# Altium PCB Copy of KNX_Relay_16CH_V1.2.PcbDoc (part 2 of 2)
Units mm, origin at the board's own origin, x right, y up, seen from the top; angles counter-clockwise.
Board outline 84.5 x 146.28 mm, 2 copper layers (F.Cu, B.Cu); 185 components, 162 nets, 571 pads, 629 vias.
Unrouted connection lines stored in the file: 248.
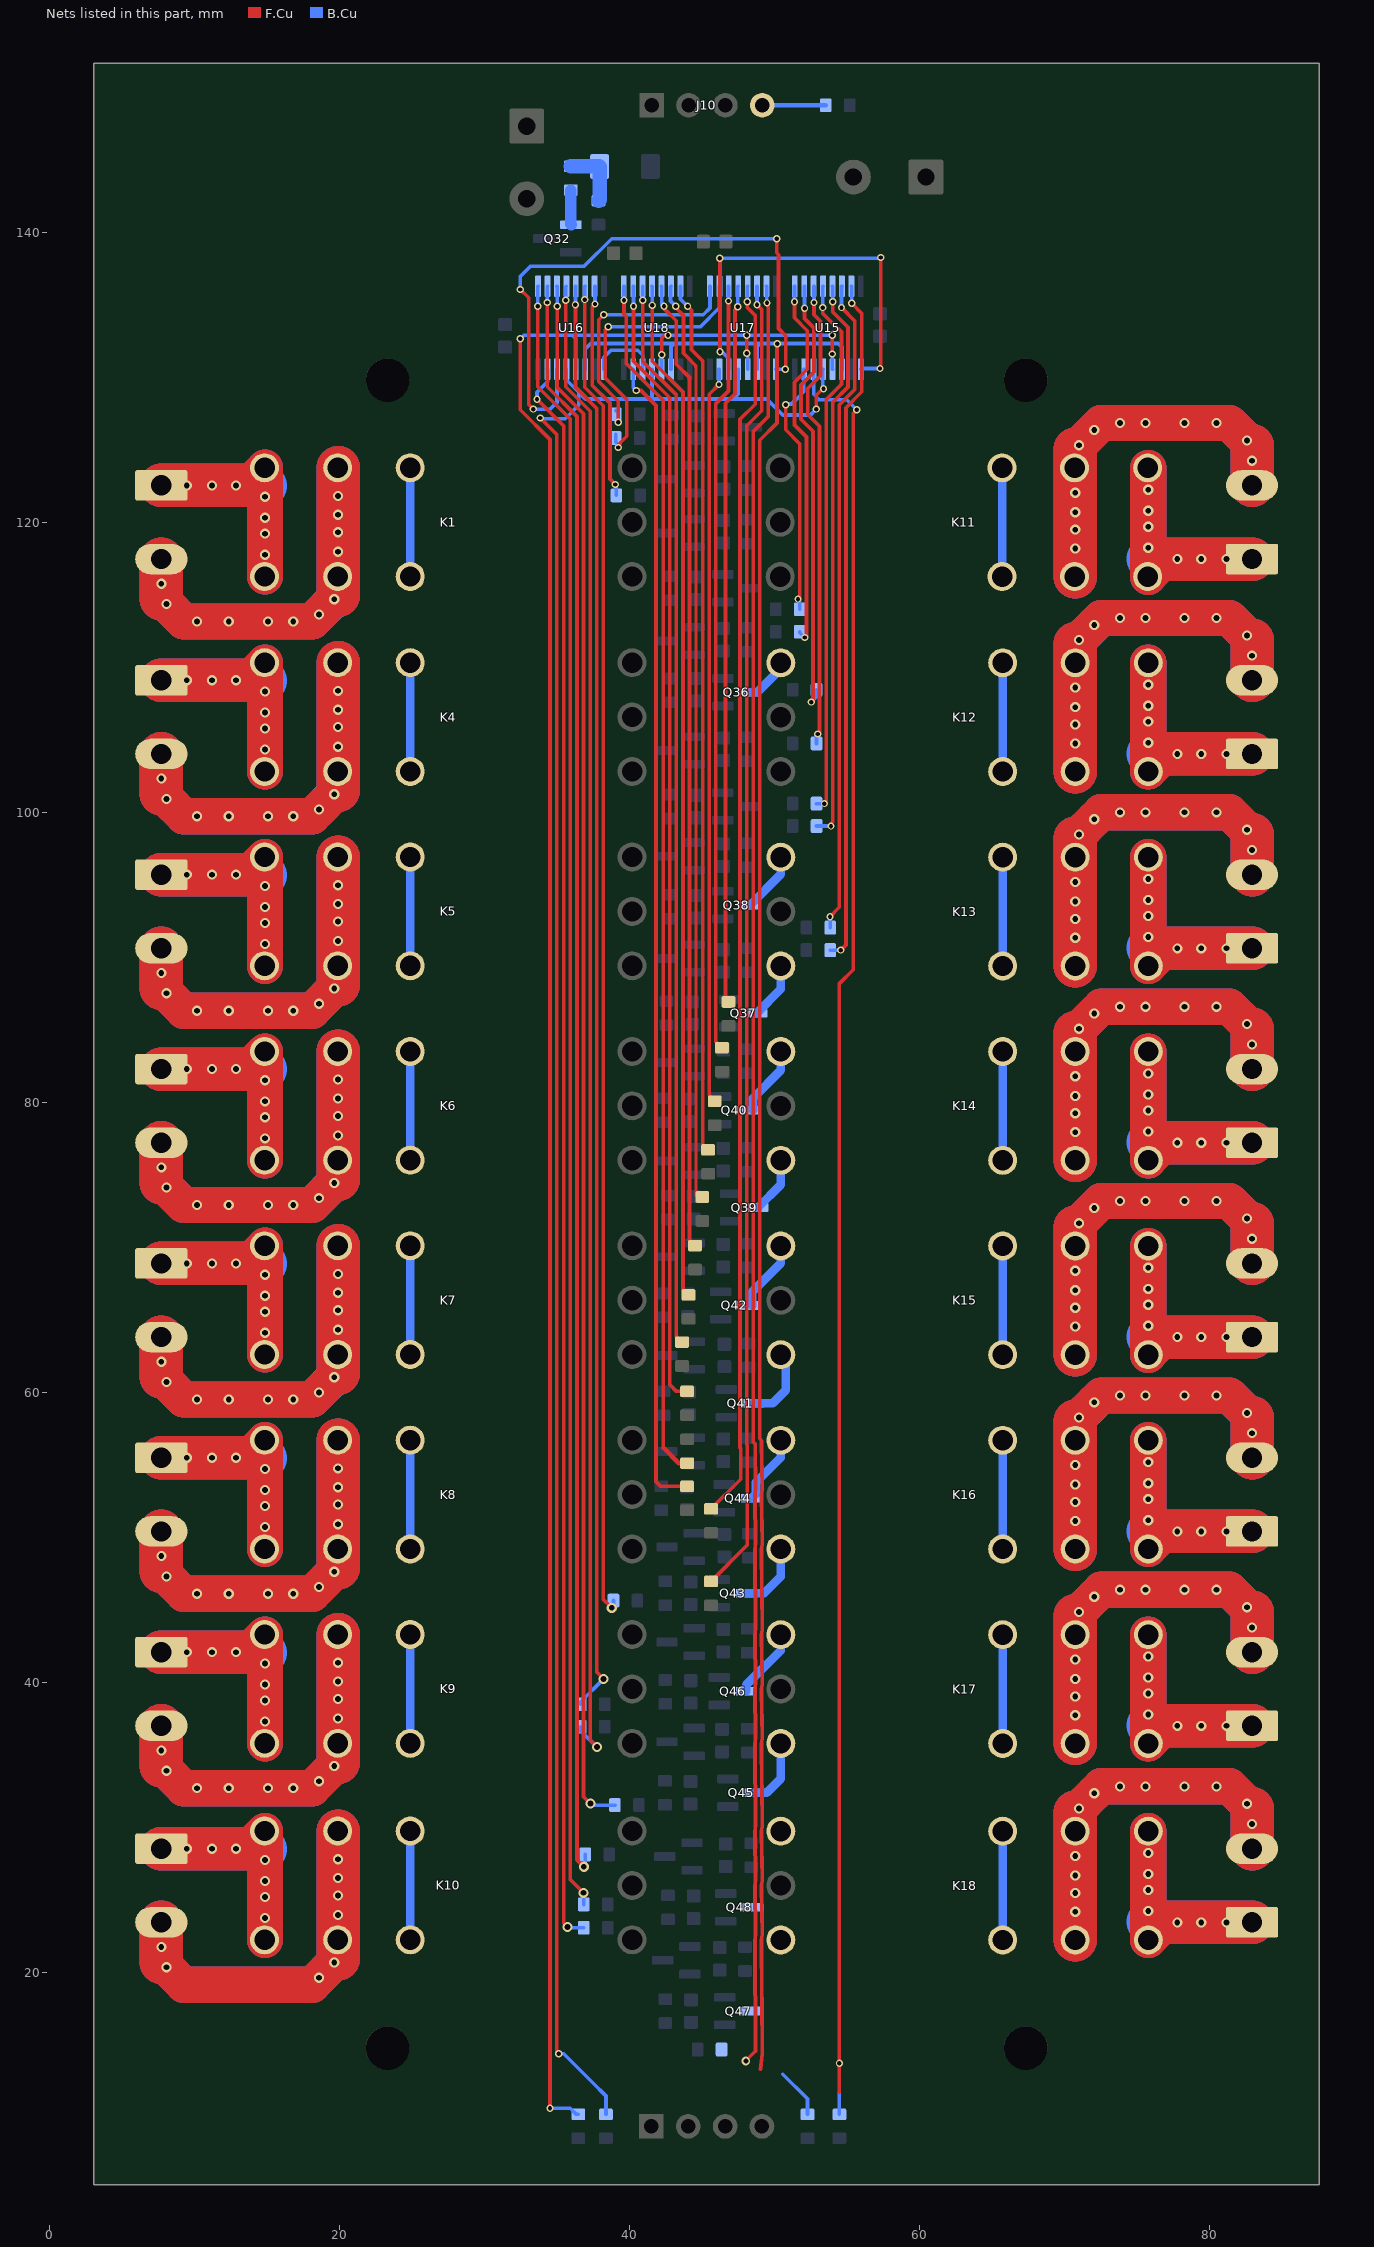
[diagram p2: the nets of this part, all layers, seen from the top]

## Via types
v1: diameter 0.7, hole 0.4, F.Cu to B.Cu, tented both sides, 342 vias
v2: diameter 0.6, hole 0.35, F.Cu to B.Cu, tented both sides, 198 vias
v3: diameter 0.5, hole 0.3, F.Cu to B.Cu, tented both sides, 83 vias
v4: diameter 0.7, hole 0.35, F.Cu to B.Cu, tented both sides, 6 vias

## Nets (pads, with @x,y where several pads share a name; then routed paths per layer and width w, separated by ;. In a path a pad name is that pad's centre, name@x,y a point inside that pad or via, vN(x,y) a via of type N, cw(c..) or ccw(c..) an arc to the next point about the centre after c; other vN are vias at no path point) (continued)
NetK12_A2: K12.A2 Q36.3 | length 3.2
  B.Cu w0.6: Q36.3@48.288,108.265 48.781,108.265 50.41,109.894 K12.A2@50.41,110.297
NetK13_A1: K13.A1 Q37.3 | length 3.9
  B.Cu w0.6: Q37.3@48.747,86.14 50.41,87.802 K13.A1@50.41,89.396
NetK13_A2: K13.A2 Q38.3 | length 4.2
  B.Cu w0.6: Q38.3@48.288,93.59 50.41,95.712 K13.A2@50.41,96.896
NetK14_A1: K14.A1 Q39.3 | length 3.9
  B.Cu w0.6: Q39.3@48.837,72.74 50.41,74.312 K14.A1@50.41,75.994
NetK14_A2: K14.A2 Q40.3 | length 4.9
  B.Cu w0.6: Q40.3@48.488,79.44 48.488,80.278 50.41,82.2 K14.A2@50.41,83.494
NetK15_A1: K15.A1 Q41.3 | length 5.2
  B.Cu w0.6: Q41.3@48.538,59.24 49.85,59.24 50.75,60.14 50.75,62.253 K15.A1@50.41,62.593
NetK15_A2: K15.A2 Q42.3 | length 4.9
  B.Cu w0.6: Q42.3@48.438,65.99 48.438,66.927 50.41,68.9 K15.A2@50.41,70.093
NetK16_A1: K16.A1 Q43.3 | length 4.7
  B.Cu w0.6: Q43.3@48.038,46.14 49.25,46.14 50.41,47.3 K16.A1@50.41,49.191
NetK16_A2: K16.A2 Q44.3 | length 4.8
  B.Cu w0.6: Q44.3@48.388,52.69 48.7,53.003 48.7,53.79 50.41,55.5 K16.A2@50.41,56.691
NetK17_A1: K17.A1 Q45.3 | length 4.6
  B.Cu w0.6: Q45.3@48.637,32.39 49.45,32.39 50.41,33.35 K17.A1@50.41,35.79
NetK17_A2: K17.A2 Q46.3 | length 4.9
  B.Cu w0.6: Q46.3@48.038,39.39 48.038,39.827 50.41,42.2 K17.A2@50.41,43.29
NetK18_A1: K18.A1 Q47.3
NetK18_A2: K18.A2 Q48.3
NetQ32_1: Q32.1 R85.1 | length 2.4
  B.Cu w0.8: R85.1@35.935,142.89 35.935,140.527 Q32.1@35.973,140.49
NetR84_2: R84.2 R85.2 Z2.2 | length 4.4
  B.Cu w1: R85.2@35.935,144.54 37.895,144.54 Z2.2@37.92,144.515 37.92,142.24 R84.2@37.845,142.165
NetU15_9: U15.9 U17.14 | length 28.1
  F.Cu w0.254: v3(46.2,138.19) 46.223,138.167 v3(46.223,131.736) ; v3(57.25,130.59) 57.3,130.64 v3(57.3,138.24)
  B.Cu w0.254: v3(46.2,138.19) 57.25,138.19 v3(57.3,138.24) ; v3(46.223,131.736) 46.367,131.736 46.825,131.277 U17.14@46.825,130.54 ; U15.9@55.925,130.54 55.975,130.59 v3(57.25,130.59)
NetU16_9: U16.9 U18.14 | length 4.8
  B.Cu w0.254: U16.9@38.225,130.54 38.225,131.365 38.7,131.84 40.55,131.84 40.885,131.505 U18.14@40.885,130.54
NetU16_14: U16.14 U17.9 | length 42.3
  F.Cu w0.254: v3(32.45,136.04) 33.027,135.463 33.027,128.113 v3(33.35,127.79) ; v3(50.127,139.54) 50.127,138.563 50.25,138.44 50.25,133.34 50.75,132.84 50.75,130.565 v3(50.725,130.54)
  B.Cu w0.254: v3(32.45,136.04) 32.45,136.94 33.15,137.64 36.85,137.64 38.75,139.54 v3(50.127,139.54) ; v3(33.35,127.79) 34.516,127.79 34.975,128.249 U16.14@34.975,130.54 ; U17.9@50.075,130.54 v3(50.725,130.54)
R1_A1: R34.2 U17.2 | length 19.9
  F.Cu w0.254: v3(38.508,133.467) 38.308,133.267 38.308,129.932 39.782,128.458 39.782,127.129 39.782,126.651 39.782,125.917 39.205,125.34 v3(39.205,125.14)
  B.Cu w0.254: v3(38.508,133.467) 44.869,133.467 46.175,134.773 U17.2@46.175,136.265 ; R34.2@39.025,126.04 39.025,125.52 39.205,125.34 v3(39.205,125.14)
R1_A2: R33.2 U16.7 | length 15.2
  F.Cu w0.254: v3(37.6,135.04) 37.4,134.84 37.4,129.442 38.628,128.214 38.628,122.963 v3(39.001,122.59)
  B.Cu w0.254: U16.7@37.575,136.265 37.6,136.24 v3(37.6,135.04) ; v3(39.001,122.59) 39.075,122.516 R33.2@39.075,121.84
R1_COM: J1.2 K1.11 | length 50.2
  F.Cu w2.5: 7.7,114.702 v1(8.05,114.352) 9.25,113.152 v1(10.15,113.152) v1(12.35,113.152) v1(15.05,113.152) v1(16.8,113.152) 18.1,113.152 v1(18.575,113.627) v1(19.625,114.677) 19.89,114.942
  F.Cu w3: 7.7,114.702 v1(7.7,115.752) J1.2@7.7,117.45 ; 19.89,114.942 19.89,116.245 v1(19.89,117.952) v1(19.89,119.302) v1(19.89,120.502) v1(19.89,121.802) K1.11@19.89,123.745
  B.Cu w2.5: 7.7,114.702 9.25,113.152 18.1,113.152 19.89,114.942
  B.Cu w3: 7.7,114.702 J1.2@7.7,117.45 ; 19.89,114.942 19.89,116.245 K1.11@19.89,123.745
R1_NC: K1.12 | length 7.5
  B.Cu w0.6: K1.12@24.86,116.245 K1.12@24.86,123.745
R1_NO: J1.1 K1.14 | length 29.8
  F.Cu w2.5: 13.635,122.53 14.85,123.745 v1(14.85,121.752) v1(14.85,120.302) v1(14.85,119.202) v1(14.85,117.752) K1.14@14.85,116.245
  F.Cu w3: J1.1@7.7,122.53 v1(9.45,122.53) v1(11.2,122.53) v1(12.85,122.53) 13.635,122.53
  B.Cu w2.5: K1.14@14.85,116.245 14.85,122.502 K1.14@14.85,123.745
  B.Cu w3: J1.1@7.7,122.53 14.822,122.53 14.85,122.502
R2_A1: R57.2 U15.1 | length 25.9
  F.Cu w0.254: v3(51.35,135.19) 51.35,134.09 52.242,133.198 52.242,130.532 51.35,129.64 51.35,126.69 52.176,125.864 52.176,112.163 v3(52.053,112.04)
  B.Cu w0.254: v3(51.35,135.19) 51.35,136.24 U15.1@51.375,136.265 ; R57.2@51.725,112.44 51.725,112.368 v3(52.053,112.04)
R2_A2: R56.2 U15.3 | length 32.5
  F.Cu w0.254: v3(52.7,135.14) 52.7,134.29 53.15,133.84 53.15,130.09 52.258,129.198 52.258,127.432 53.084,126.606 53.084,105.513 v3(52.961,105.39)
  B.Cu w0.254: U15.3@52.675,136.265 52.7,136.24 v3(52.7,135.14) ; R56.2@52.875,104.74 52.875,105.304 v3(52.961,105.39)
R2_COM: J2.2 K4.11 | length 50.2
  F.Cu w2.5: 7.7,101.265 v1(8.05,100.915) 9.25,99.715 v1(10.15,99.715) v1(12.35,99.715) v1(15.05,99.715) v1(16.8,99.715) 18.1,99.715 v1(18.575,100.19) v1(19.625,101.24) 19.89,101.505
  F.Cu w3: 7.7,101.265 v1(7.7,102.315) J2.2@7.7,104.012 ; 19.89,101.505 19.89,102.807 v1(19.89,104.515) v1(19.89,105.865) v1(19.89,107.065) v1(19.89,108.365) K4.11@19.89,110.307
  B.Cu w2.5: 7.7,101.265 9.25,99.715 18.1,99.715 19.89,101.505
  B.Cu w3: 7.7,101.265 J2.2@7.7,104.012 ; 19.89,101.505 19.89,102.807 K4.11@19.89,110.307
R2_NC: K4.12 | length 7.5
  B.Cu w0.6: K4.12@24.86,102.807 K4.12@24.86,110.307
R2_NO: J2.1 K4.14 | length 29.8
  F.Cu w2.5: 13.635,109.092 14.85,110.307 v1(14.85,108.315) v1(14.85,106.865) v1(14.85,105.765) v1(14.85,104.315) K4.14@14.85,102.807
  F.Cu w3: J2.1@7.7,109.092 v1(9.45,109.092) v1(11.2,109.092) v1(12.85,109.092) 13.635,109.092
  B.Cu w2.5: K4.14@14.85,102.807 14.85,109.065 K4.14@14.85,110.307
  B.Cu w3: J2.1@7.7,109.092 14.822,109.092 14.85,109.065
R3_A1: R61.2 U15.5 | length 39.2
  F.Cu w0.254: v3(53.869,99.04) 53.869,99.209 53.992,99.332 53.992,128.266 55.046,129.32 55.046,133.436 53.992,134.49 53.992,135.182 v3(54,135.19)
  B.Cu w0.254: R61.2@52.875,99.04 v3(53.869,99.04) ; U15.5@53.975,136.265 54,136.24 v3(54,135.19)
R3_A2: R60.2 U15.7 | length 47.4
  F.Cu w0.254: v3(54.55,90.49) 54.9,90.84 54.9,127.89 56,128.99 56,134.39 v3(55.3,135.09)
  B.Cu w0.254: R60.2@53.825,90.49 v3(54.55,90.49) ; U15.7@55.275,136.265 55.3,136.24 v3(55.3,135.09)
R3_COM: J3.2 K5.11 | length 50.2
  F.Cu w2.5: 7.7,87.863 v1(8.05,87.513) 9.25,86.313 v1(10.15,86.313) v1(12.35,86.313) v1(15.05,86.313) v1(16.8,86.313) 18.1,86.313 v1(18.575,86.788) v1(19.625,87.838) 19.89,88.103
  F.Cu w3: 7.7,87.863 v1(7.7,88.913) J3.2@7.7,90.611 ; 19.89,88.103 19.89,89.406 v1(19.89,91.113) v1(19.89,92.463) v1(19.89,93.663) v1(19.89,94.963) K5.11@19.89,96.906
  B.Cu w2.5: 7.7,87.863 9.25,86.313 18.1,86.313 19.89,88.103
  B.Cu w3: 7.7,87.863 J3.2@7.7,90.611 ; 19.89,88.103 19.89,89.406 K5.11@19.89,96.906
R3_NC: K5.12 | length 7.5
  B.Cu w0.6: K5.12@24.86,89.406 K5.12@24.86,96.906
R3_NO: J3.1 K5.14 | length 29.8
  F.Cu w2.5: 13.635,95.691 14.85,96.906 v1(14.85,94.913) v1(14.85,93.463) v1(14.85,92.363) v1(14.85,90.913) K5.14@14.85,89.406
  F.Cu w3: J3.1@7.7,95.691 v1(9.45,95.691) v1(11.2,95.691) v1(12.85,95.691) 13.635,95.691
  B.Cu w2.5: K5.14@14.85,89.406 14.85,95.663 K5.14@14.85,96.906
  B.Cu w3: J3.1@7.7,95.691 14.822,95.691 14.85,95.663
R4_A1: R65.2 U17.3 | length 53
  F.Cu w0.254: R65.2@46.35,83.765 45.936,84.179 45.936,128.176 46.8,129.04 v3(46.8,135.24)
  B.Cu w0.254: v3(46.8,135.24) 46.8,136.24 U17.3@46.825,136.265
R4_A2: R64.2 U18.7 | length 60.3
  F.Cu w0.254: v3(43.983,134.88) 44.25,134.613 44.25,131.89 45.028,131.112 45.028,77.087 R64.2@45.4,76.715
  B.Cu w0.254: U18.7@43.485,136.265 43.5,136.25 43.5,135.363 v3(43.983,134.88)
R4_COM: J4.2 K6.11 | length 50.2
  F.Cu w2.5: 7.7,74.462 v1(8.05,74.112) 9.25,72.912 v1(10.15,72.912) v1(12.35,72.912) v1(15.05,72.912) v1(16.8,72.912) 18.1,72.912 v1(18.575,73.387) v1(19.625,74.437) 19.89,74.702
  F.Cu w3: 7.7,74.462 v1(7.7,75.512) J4.2@7.7,77.209 ; 19.89,74.702 19.89,76.004 v1(19.89,77.712) v1(19.89,79.062) v1(19.89,80.262) v1(19.89,81.562) K6.11@19.89,83.504
  B.Cu w2.5: 7.7,74.462 9.25,72.912 18.1,72.912 19.89,74.702
  B.Cu w3: 7.7,74.462 J4.2@7.7,77.209 ; 19.89,74.702 19.89,76.004 K6.11@19.89,83.504
R4_NC: K6.12 | length 7.5
  B.Cu w0.6: K6.12@24.86,76.004 K6.12@24.86,83.504
R4_NO: J4.1 K6.14 | length 29.8
  F.Cu w2.5: 13.635,82.289 14.85,83.504 v1(14.85,81.512) v1(14.85,80.062) v1(14.85,78.962) v1(14.85,77.512) K6.14@14.85,76.004
  F.Cu w3: J4.1@7.7,82.289 v1(9.45,82.289) v1(11.2,82.289) v1(12.85,82.289) 13.635,82.289
  B.Cu w2.5: K6.14@14.85,76.004 14.85,82.262 K6.14@14.85,83.504
  B.Cu w3: J4.1@7.7,82.289 14.822,82.289 14.85,82.262
R5_A1: R69.2 U18.5 | length 67.1
  F.Cu w0.254: v3(42.355,134.88) 42.355,134.735 43.21,133.88 43.21,130.88 44.12,129.97 44.12,70.495 R69.2@44.5,70.115
  B.Cu w0.254: U18.5@42.185,136.265 42.2,136.25 42.2,135.035 v3(42.355,134.88)
R5_A2: R68.2 U18.3 | length 73.9
  F.Cu w0.254: v3(40.9,135.29) 40.9,131.074 43.212,128.762 43.212,63.853 R68.2@43.6,63.465
  B.Cu w0.254: U18.3@40.885,136.265 40.9,136.25 v3(40.9,135.29)
R5_COM: J5.2 K7.11 | length 50.2
  F.Cu w2.5: 7.7,61.06 v1(8.05,60.71) 9.25,59.51 v1(10.15,59.51) v1(12.35,59.51) v1(15.05,59.51) v1(16.8,59.51) 18.1,59.51 v1(18.575,59.985) v1(19.625,61.035) 19.89,61.3
  F.Cu w3: 7.7,61.06 v1(7.7,62.11) J5.2@7.7,63.808 ; 19.89,61.3 19.89,62.603 v1(19.89,64.31) v1(19.89,65.66) v1(19.89,66.86) v1(19.89,68.16) K7.11@19.89,70.103
  B.Cu w2.5: 7.7,61.06 9.25,59.51 18.1,59.51 19.89,61.3
  B.Cu w3: 7.7,61.06 J5.2@7.7,63.808 ; 19.89,61.3 19.89,62.603 K7.11@19.89,70.103
R5_NC: K7.12 | length 7.5
  B.Cu w0.6: K7.12@24.86,62.603 K7.12@24.86,70.103
R5_NO: J5.1 K7.14 | length 29.8
  F.Cu w2.5: 13.635,68.888 14.85,70.103 v1(14.85,68.11) v1(14.85,66.66) v1(14.85,65.56) v1(14.85,64.11) K7.14@14.85,62.603
  F.Cu w3: J5.1@7.7,68.888 v1(9.45,68.888) v1(11.2,68.888) v1(12.85,68.888) 13.635,68.888
  B.Cu w2.5: K7.14@14.85,62.603 14.85,68.86 K7.14@14.85,70.103
  B.Cu w3: J5.1@7.7,68.888 14.822,68.888 14.85,68.86
R6_A1: R73.2 U18.1 | length 83.3
  F.Cu w0.254: v3(39.6,135.29) 39.6,134.34 39.75,134.19 39.75,130.94 42.304,128.386 42.304,56.19
  F.Cu w0.3: 42.304,56.19 43.379,55.115 R73.2@43.95,55.115
  B.Cu w0.254: U18.1@39.585,136.265 39.6,136.25 v3(39.6,135.29)
R6_A2: R72.2 U17.5 | length 85.8
  F.Cu w0.254: R72.2@45.6,51.965 47.646,54.011 47.646,55.966 47.646,56.154 47.602,56.198 47.602,56.407 47.602,127.09 48.642,128.13 48.642,134.248 48.1,134.79 v3(48.1,135.19)
  B.Cu w0.254: v3(48.1,135.19) 48.1,136.24 U17.5@48.125,136.265
R6_COM: J6.2 K8.11 | length 50.2
  F.Cu w2.5: 7.7,47.659 v1(8.05,47.309) 9.25,46.109 v1(10.15,46.109) v1(12.35,46.109) v1(15.05,46.109) v1(16.8,46.109) 18.1,46.109 v1(18.575,46.584) v1(19.625,47.634) 19.89,47.899
  F.Cu w3: 7.7,47.659 v1(7.7,48.709) J6.2@7.7,50.406 ; 19.89,47.899 19.89,49.201 v1(19.89,50.909) v1(19.89,52.259) v1(19.89,53.459) v1(19.89,54.759) K8.11@19.89,56.701
  B.Cu w2.5: 7.7,47.659 9.25,46.109 18.1,46.109 19.89,47.899
  B.Cu w3: 7.7,47.659 J6.2@7.7,50.406 ; 19.89,47.899 19.89,49.201 K8.11@19.89,56.701
R6_NC: K8.12 | length 7.5
  B.Cu w0.6: K8.12@24.86,49.201 K8.12@24.86,56.701
R6_NO: J6.1 K8.14 | length 29.8
  F.Cu w2.5: 13.635,55.486 14.85,56.701 v1(14.85,54.709) v1(14.85,53.259) v1(14.85,52.159) v1(14.85,50.709) K8.14@14.85,49.201
  F.Cu w3: J6.1@7.7,55.486 v1(9.45,55.486) v1(11.2,55.486) v1(12.85,55.486) 13.635,55.486
  B.Cu w2.5: K8.14@14.85,49.201 14.85,55.459 K8.14@14.85,56.701
  B.Cu w3: J6.1@7.7,55.486 14.822,55.486 14.85,55.459
R7_A1: R77.2 U16.6 | length 92.5
  F.Cu w0.254: v3(36.9,135.34) 36.9,129.3 38.174,128.026 38.174,45.716 v1(38.75,45.14)
  B.Cu w0.254: v3(36.9,135.34) 36.9,136.24 U16.6@36.925,136.265
  B.Cu w0.3: v1(38.75,45.14) 38.875,45.265 R77.2@38.875,45.64
R7_A2: R76.2 U16.4 | length 103.5
  F.Cu w0.254: v3(35.577,135.29) 35.577,135.129 35.577,134.651 35.577,129.339 37.266,127.65 37.266,36.013 v1(37.739,35.54)
  B.Cu w0.254: v3(35.577,135.29) 35.577,136.217 U16.4@35.625,136.265 ; R76.2@36.625,36.94 36.625,36.654 v1(37.739,35.54)
R7_COM: J7.2 K9.11 | length 50.2
  F.Cu w2.5: 7.7,34.257 v1(8.05,33.907) 9.25,32.707 v1(10.15,32.707) v1(12.35,32.707) v1(15.05,32.707) v1(16.8,32.707) 18.1,32.707 v1(18.575,33.182) v1(19.625,34.232) 19.89,34.497
  F.Cu w3: 7.7,34.257 v1(7.7,35.307) J7.2@7.7,37.005 ; 19.89,34.497 19.89,35.8 v1(19.89,37.507) v1(19.89,38.857) v1(19.89,40.057) v1(19.89,41.357) K9.11@19.89,43.3
  B.Cu w2.5: 7.7,34.257 9.25,32.707 18.1,32.707 19.89,34.497
  B.Cu w3: 7.7,34.257 J7.2@7.7,37.005 ; 19.89,34.497 19.89,35.8 K9.11@19.89,43.3
R7_NC: K9.12 | length 7.5
  B.Cu w0.6: K9.12@24.86,35.8 K9.12@24.86,43.3
R7_NO: J7.1 K9.14 | length 29.8
  F.Cu w2.5: 13.635,42.085 14.85,43.3 v1(14.85,41.307) v1(14.85,39.857) v1(14.85,38.757) v1(14.85,37.307) K9.14@14.85,35.8
  F.Cu w3: J7.1@7.7,42.085 v1(9.45,42.085) v1(11.2,42.085) v1(12.85,42.085) 13.635,42.085
  B.Cu w2.5: K9.14@14.85,35.8 14.85,42.057 K9.14@14.85,43.3
  B.Cu w3: J7.1@7.7,42.085 14.822,42.085 14.85,42.057
R8_A1: R81.2 U16.2 | length 110.9
  F.Cu w0.254: v3(34.303,135.141) 34.303,129.329 36.358,127.274 36.358,27.763 v1(36.831,27.29)
  B.Cu w0.254: v3(34.303,135.141) 34.303,136.243 U16.2@34.325,136.265 ; v1(36.831,27.29) 36.925,27.384 R81.2@36.925,28.14
R8_A2: R80.2 U16.15 | length 109.7
  F.Cu w0.254: v3(33.604,128.472) 35.45,126.626 35.45,23.39 v1(35.7,23.14)
  B.Cu w0.254: v3(33.604,128.472) 33.604,128.944 34.35,129.69 34.35,130.515 U16.15@34.325,130.54 ; v1(35.7,23.14) 35.75,23.09 R80.2@36.825,23.09
R8_COM: J8.2 K10.11 | length 50.2
  F.Cu w2.5: 7.7,20.707 v1(8.05,20.357) 9.25,19.157 10.15,19.157 12.35,19.157 15.05,19.157 16.8,19.157 18.1,19.157 v1(18.575,19.632) v1(19.625,20.682) 19.89,20.947
  F.Cu w3: 7.7,20.707 v1(7.7,21.757) J8.2@7.7,23.455 ; 19.89,20.947 19.89,22.25 v1(19.89,23.957) v1(19.89,25.307) v1(19.89,26.507) v1(19.89,27.807) K10.11@19.89,29.75
  B.Cu w2.5: 7.7,20.707 9.25,19.157 18.1,19.157 19.89,20.947
  B.Cu w3: 7.7,20.707 J8.2@7.7,23.455 ; 19.89,20.947 19.89,22.25 K10.11@19.89,29.75
R8_NC: K10.12 | length 7.5
  B.Cu w0.6: K10.12@24.86,22.25 K10.12@24.86,29.75
R8_NO: J8.1 K10.14 | length 29.8
  F.Cu w2.5: 13.635,28.535 14.85,29.75 v1(14.85,27.757) v1(14.85,26.307) v1(14.85,25.207) v1(14.85,23.757) K10.14@14.85,22.25
  F.Cu w3: J8.1@7.7,28.535 v1(9.45,28.535) v1(11.2,28.535) v1(12.85,28.535) 13.635,28.535
  B.Cu w2.5: K10.14@14.85,22.25 14.85,28.507 K10.14@14.85,29.75
  B.Cu w3: J8.1@7.7,28.535 14.822,28.535 14.85,28.507
R9_A1: R93.2 U15.15 | length 17.8
  F.Cu w0.254: v3(50.75,128.09) 50.75,126.362 51.722,125.39 51.722,114.813 v3(51.599,114.69)
  B.Cu w0.254: v3(50.75,128.09) 50.8,128.14 51.15,128.14 52,128.99 52,130.515 U15.15@52.025,130.54 ; v3(51.599,114.69) 51.725,114.564 R93.2@51.725,113.99
R9_A2: R91.2 U17.1 | length 18
  F.Cu w0.254: v3(38.2,134.29) 37.854,133.944 37.854,129.686 39.205,128.335 v3(39.205,126.89)
  B.Cu w0.254: v3(38.2,134.29) 38.874,134.29 38.887,134.303 45.063,134.303 45.525,134.765 U17.1@45.525,136.265 ; R91.2@39.025,127.69 39.205,127.51 v3(39.205,126.89)
R9_COM: J11.2 K11.11 | length 50.2
  F.Cu w2.5: 70.71,125.038 v1(70.975,125.303) v1(72.025,126.353) 72.5,126.828 v1(73.8,126.828) v1(75.55,126.828) v1(78.25,126.828) v1(80.45,126.828) 81.35,126.828 v1(82.55,125.628) 82.9,125.278
  F.Cu w3: K11.11@70.71,116.235 v1(70.71,118.178) v1(70.71,119.478) v1(70.71,120.678) v1(70.71,122.028) 70.71,123.735 70.71,125.038 ; J11.2@82.9,122.53 v1(82.9,124.228) 82.9,125.278
  B.Cu w2.5: 70.71,125.038 72.5,126.828 81.35,126.828 82.9,125.278
  B.Cu w3: K11.11@70.71,116.235 70.71,123.735 70.71,125.038 ; J11.2@82.9,122.53 82.9,125.278
R9_NC: K11.12 | length 7.5
  B.Cu w0.6: K11.12@65.669,116.24 K11.12@65.669,123.74
R9_NO: J11.1 K11.14 | length 29.8
  F.Cu w2.5: K11.14@75.75,123.735 v1(75.75,122.228) v1(75.75,120.778) v1(75.75,119.678) v1(75.75,118.228) 75.75,116.235 76.965,117.45
  F.Cu w3: 76.965,117.45 v1(77.75,117.45) v1(79.4,117.45) v1(81.15,117.45) J11.1@82.9,117.45
  B.Cu w2.5: K11.14@75.75,116.235 75.75,117.478 K11.14@75.75,123.735
  B.Cu w3: 75.75,117.478 75.778,117.45 J11.1@82.9,117.45
R10_A1: R94.2 U15.4 | length 37.2
  F.Cu w0.254: v3(53.305,134.787) 53.305,134.39 54.592,133.103 54.592,129.508 53.538,128.454 53.538,100.828 53.415,100.705 v3(53.415,100.59)
  B.Cu w0.254: R94.2@52.875,100.59 v3(53.415,100.59) ; v3(53.305,134.787) 53.305,136.245 U15.4@53.325,136.265
R10_A2: R92.2 U15.2 | length 30.7
  F.Cu w0.254: v3(52.05,134.74) 52.05,134.036 52.696,133.39 52.696,130.34 51.804,129.448 51.804,127.086 52.63,126.26 52.63,107.713 v3(52.507,107.59)
  B.Cu w0.254: U15.2@52.025,136.265 52.05,136.24 v3(52.05,134.74) ; v3(52.507,107.59) 52.875,107.958 R92.2@52.875,108.44
R10_COM: J12.2 K12.11 | length 50.2
  F.Cu w2.5: 70.71,111.6 v1(70.975,111.865) v1(72.025,112.915) 72.5,113.39 v1(73.8,113.39) v1(75.55,113.39) v1(78.25,113.39) v1(80.45,113.39) 81.35,113.39 v1(82.55,112.19) 82.9,111.84
  F.Cu w3: K12.11@70.71,102.797 v1(70.71,104.74) v1(70.71,106.04) v1(70.71,107.24) v1(70.71,108.59) K12.11@70.71,110.297 70.71,111.6 ; J12.2@82.9,109.092 v1(82.9,110.79) 82.9,111.84
  B.Cu w2.5: 70.71,111.6 72.5,113.39 81.35,113.39 82.9,111.84
  B.Cu w3: K12.11@70.71,102.797 K12.11@70.71,110.297 70.71,111.6 ; J12.2@82.9,109.092 82.9,111.84
R10_NC: K12.12 | length 7.5
  B.Cu w0.6: K12.12@65.71,102.797 K12.12@65.71,110.297
R10_NO: J12.1 K12.14 | length 29.8
  F.Cu w2.5: K12.14@75.75,110.297 v1(75.75,108.79) v1(75.75,107.34) v1(75.75,106.24) v1(75.75,104.79) K12.14@75.75,102.797 76.965,104.012
  F.Cu w3: 76.965,104.012 v1(77.75,104.012) v1(79.4,104.012) v1(81.15,104.012) J12.1@82.9,104.012
  B.Cu w2.5: K12.14@75.75,102.797 75.75,104.04 K12.14@75.75,110.297
  B.Cu w3: 75.75,104.04 75.778,104.012 J12.1@82.9,104.012
R11_A1: R100.2 U17.4 | length 49.8
  F.Cu w0.254: R100.2@46.8,86.915 46.6,87.115 46.6,128.198 47.254,128.852 47.254,134.644 v3(47.45,134.84)
  B.Cu w0.254: v3(47.45,134.84) 47.45,136.24 U17.4@47.475,136.265
R11_A2: R99.2 U15.6 | length 45.3
  F.Cu w0.254: v3(53.8,92.79) 54.446,93.436 54.446,128.078 55.5,129.132 55.5,133.89 v3(54.6,134.79)
  B.Cu w0.254: v3(53.8,92.79) 53.825,92.765 R99.2@53.825,92.04 ; v3(54.6,134.79) 54.6,136.24 U15.6@54.625,136.265
R11_COM: J13.2 K13.11 | length 50.2
  F.Cu w2.5: 70.71,98.199 v1(70.975,98.464) v1(72.025,99.514) 72.5,99.989 v1(73.8,99.989) v1(75.55,99.989) v1(78.25,99.989) v1(80.45,99.989) 81.35,99.989 v1(82.55,98.789) 82.9,98.439
  F.Cu w3: K13.11@70.71,89.396 v1(70.71,91.339) v1(70.71,92.639) v1(70.71,93.839) v1(70.71,95.189) K13.11@70.71,96.896 70.71,98.199 ; J13.2@82.9,95.691 v1(82.9,97.389) 82.9,98.439
  B.Cu w2.5: 70.71,98.199 72.5,99.989 81.35,99.989 82.9,98.439
  B.Cu w3: K13.11@70.71,89.396 K13.11@70.71,96.896 70.71,98.199 ; J13.2@82.9,95.691 82.9,98.439
R11_NC: K13.12 | length 7.5
  B.Cu w0.6: K13.12@65.71,89.396 K13.12@65.71,96.896
R11_NO: J13.1 K13.14 | length 29.8
  F.Cu w2.5: K13.14@75.75,96.896 v1(75.75,95.389) v1(75.75,93.939) v1(75.75,92.839) v1(75.75,91.389) K13.14@75.75,89.396 76.965,90.611
  F.Cu w3: 76.965,90.611 v1(77.75,90.611) v1(79.4,90.611) v1(81.15,90.611) J13.1@82.9,90.611
  B.Cu w2.5: K13.14@75.75,89.396 75.75,90.639 K13.14@75.75,96.896
  B.Cu w3: 75.75,90.639 75.778,90.611 J13.1@82.9,90.611
R12_A1: R104.2 U18.6 | length 63.9
  F.Cu w0.2: R104.2@44.554,73.566 44.554,130.666
  F.Cu w0.254: v3(43.167,134.88) 43.167,134.773 43.7,134.24 43.7,131.64 44.554,130.786 44.554,130.666 ; R104.2@44.574,73.666 44.775,73.465 R104.2@45,73.465
  B.Cu w0.254: U18.6@42.835,136.265 42.8,136.23 42.8,135.247 v3(43.167,134.88)
R12_A2: R103.2 U17.15 | length 50.9
  F.Cu w0.254: R103.2@45.85,80.065 45.85,80.14 45.482,80.508 45.482,128.822 v3(46.15,129.49)
  B.Cu w0.254: v3(46.15,129.49) 46.15,130.515 U17.15@46.175,130.54
R12_COM: J14.2 K14.11 | length 50.2
  F.Cu w2.5: 70.71,84.797 v1(70.975,85.062) v1(72.025,86.112) 72.5,86.587 v1(73.8,86.587) v1(75.55,86.587) v1(78.25,86.587) v1(80.45,86.587) 81.35,86.587 v1(82.55,85.387) 82.9,85.037
  F.Cu w3: K14.11@70.71,75.994 v1(70.71,77.937) v1(70.71,79.237) v1(70.71,80.437) v1(70.71,81.787) K14.11@70.71,83.494 70.71,84.797 ; J14.2@82.9,82.289 v1(82.9,83.987) 82.9,85.037
  B.Cu w2.5: 70.71,84.797 72.5,86.587 81.35,86.587 82.9,85.037
  B.Cu w3: K14.11@70.71,75.994 K14.11@70.71,83.494 70.71,84.797 ; J14.2@82.9,82.289 82.9,85.037
R12_NC: K14.12 | length 7.5
  B.Cu w0.6: K14.12@65.71,75.994 K14.12@65.71,83.494
R12_NO: J14.1 K14.14 | length 29.8
  F.Cu w2.5: K14.14@75.75,83.494 v1(75.75,81.987) v1(75.75,80.537) v1(75.75,79.437) v1(75.75,77.987) K14.14@75.75,75.994 76.965,77.209
  F.Cu w3: 76.965,77.209 v1(77.75,77.209) v1(79.4,77.209) v1(81.15,77.209) J14.1@82.9,77.209
  B.Cu w2.5: K14.14@75.75,75.994 75.75,77.237 K14.14@75.75,83.494
  B.Cu w3: 75.75,77.237 75.778,77.209 J14.1@82.9,77.209
R13_A1: R108.2 U18.2 | length 78.3
  F.Cu w0.254: v3(40.25,134.89) 40.25,131.082 42.758,128.574 42.758,60.532 43.225,60.065 R108.2@44.1,60.065
  B.Cu w0.254: U18.2@40.235,136.265 40.25,136.25 v3(40.25,134.89)
R13_A2: R107.2 U18.4 | length 70.6
  F.Cu w0.254: v3(41.55,134.94) 41.55,131.09 43.666,128.974 43.666,67.099 R107.2@44.05,66.715
  B.Cu w0.254: U18.4@41.535,136.265 41.55,136.25 v3(41.55,134.94)
R13_COM: J15.2 K15.11 | length 50.2
  F.Cu w2.5: 70.71,71.396 v1(70.975,71.661) v1(72.025,72.711) 72.5,73.186 v1(73.8,73.186) v1(75.55,73.186) v1(78.25,73.186) v1(80.45,73.186) 81.35,73.186 v1(82.55,71.986) 82.9,71.636
  F.Cu w3: K15.11@70.71,62.593 v1(70.71,64.536) v1(70.71,65.836) v1(70.71,67.036) v1(70.71,68.386) K15.11@70.71,70.093 70.71,71.396 ; J15.2@82.9,68.888 v1(82.9,70.586) 82.9,71.636
  B.Cu w2.5: 70.71,71.396 72.5,73.186 81.35,73.186 82.9,71.636
  B.Cu w3: K15.11@70.71,62.593 K15.11@70.71,70.093 70.71,71.396 ; J15.2@82.9,68.888 82.9,71.636
R13_NC: K15.12 | length 7.5
  B.Cu w0.6: K15.12@65.71,62.593 K15.12@65.71,70.093
R13_NO: J15.1 K15.14 | length 29.8
  F.Cu w2.5: K15.14@75.75,70.093 v1(75.75,68.586) v1(75.75,67.136) v1(75.75,66.036) v1(75.75,64.586) K15.14@75.75,62.593 76.965,63.808
  F.Cu w3: 76.965,63.808 v1(77.75,63.808) v1(79.4,63.808) v1(81.15,63.808) J15.1@82.9,63.808
  B.Cu w2.5: K15.14@75.75,62.593 75.75,63.836 K15.14@75.75,70.093
  B.Cu w3: 75.75,63.836 75.778,63.808 J15.1@82.9,63.808
R14_A1: R112.2 U17.6 | length 90.9
  F.Cu w0.254: R112.2@45.6,46.965 48.1,49.465 48.1,56.154 48.1,56.342 48.056,56.386 48.056,126.64 49.096,127.68 49.096,134.657 v3(48.769,134.984)
  B.Cu w0.254: v3(48.769,134.984) 48.769,136.259 U17.6@48.775,136.265
R14_A2: R111.2 U18.15 | length 79.8
  F.Cu w0.254: v3(40.45,129.069) 40.771,129.069 41.8,128.04 41.8,53.84 42.125,53.515 R111.2@43.94,53.515
  B.Cu w0.254: U18.15@40.235,130.54 40.235,129.284 v3(40.45,129.069)
R14_COM: J16.2 K16.11 | length 50.2
  F.Cu w2.5: 70.71,57.994 v1(70.975,58.259) v1(72.025,59.309) 72.5,59.784 v1(73.8,59.784) v1(75.55,59.784) v1(78.25,59.784) v1(80.45,59.784) 81.35,59.784 v1(82.55,58.584) 82.9,58.234
  F.Cu w3: K16.11@70.71,49.191 v1(70.71,51.134) v1(70.71,52.434) v1(70.71,53.634) v1(70.71,54.984) K16.11@70.71,56.691 70.71,57.994 ; J16.2@82.9,55.486 v1(82.9,57.184) 82.9,58.234
  B.Cu w2.5: 70.71,57.994 72.5,59.784 81.35,59.784 82.9,58.234
  B.Cu w3: K16.11@70.71,49.191 K16.11@70.71,56.691 70.71,57.994 ; J16.2@82.9,55.486 82.9,58.234
R14_NC: K16.12 | length 7.5
  B.Cu w0.6: K16.12@65.71,49.191 K16.12@65.71,56.691
R14_NO: J16.1 K16.14 | length 29.8
  F.Cu w2.5: K16.14@75.75,56.691 v1(75.75,55.184) v1(75.75,53.734) v1(75.75,52.634) v1(75.75,51.184) K16.14@75.75,49.191 76.965,50.406
  F.Cu w3: 76.965,50.406 v1(77.75,50.406) v1(79.4,50.406) v1(81.15,50.406) J16.1@82.9,50.406
  B.Cu w2.5: K16.14@75.75,49.191 75.75,50.434 K16.14@75.75,56.691
  B.Cu w3: 75.75,50.434 75.778,50.406 J16.1@82.9,50.406
R15_A1: R116.2 U16.3 | length 107.3
  F.Cu w0.254: v3(35,134.89) 35,129.274 36.812,127.462 36.812,32.113 v1(37.285,31.64)
  B.Cu w0.254: U16.3@34.975,136.265 35,136.24 v3(35,134.89) ; v1(37.285,31.64) 37.385,31.54 R116.2@38.975,31.54
R15_A2: R115.2 U16.5 | length 99.2
  F.Cu w0.254: v3(36.25,134.99) 36.25,129.308 37.72,127.838 37.72,40.713 v1(38.193,40.24)
  B.Cu w0.254: v3(36.25,134.99) 36.25,136.24 U16.5@36.275,136.265 ; R115.2@36.625,38.49 36.625,38.672 v1(38.193,40.24)
R15_COM: J17.2 K17.11 | length 50.2
  F.Cu w2.5: 70.71,44.593 v1(70.975,44.858) v1(72.025,45.908) 72.5,46.383 v1(73.8,46.383) v1(75.55,46.383) v1(78.25,46.383) v1(80.45,46.383) 81.35,46.383 v1(82.55,45.183) 82.9,44.833
  F.Cu w3: K17.11@70.71,35.79 v1(70.71,37.733) v1(70.71,39.033) v1(70.71,40.233) v1(70.71,41.583) K17.11@70.71,43.29 70.71,44.593 ; J17.2@82.9,42.085 v1(82.9,43.783) 82.9,44.833
  B.Cu w2.5: 70.71,44.593 72.5,46.383 81.35,46.383 82.9,44.833
  B.Cu w3: K17.11@70.71,35.79 K17.11@70.71,43.29 70.71,44.593 ; J17.2@82.9,42.085 82.9,44.833
R15_NC: K17.12 | length 7.5
  B.Cu w0.6: K17.12@65.71,35.79 K17.12@65.71,43.29
R15_NO: J17.1 K17.14 | length 29.8
  F.Cu w2.5: K17.14@75.75,43.29 v1(75.75,41.783) v1(75.75,40.333) v1(75.75,39.233) v1(75.75,37.783) K17.14@75.75,35.79 76.965,37.005
  F.Cu w3: 76.965,37.005 v1(77.75,37.005) v1(79.4,37.005) v1(81.15,37.005) J17.1@82.9,37.005
  B.Cu w2.5: K17.14@75.75,35.79 75.75,37.033 K17.14@75.75,43.29
  B.Cu w3: 75.75,37.033 75.778,37.005 J17.1@82.9,37.005
R16_A1: R120.2 U17.7 | length 123.2
  F.Cu w0.254: v2(48,13.9) 48,13.92 48.586,14.506 48.67,14.59 48.629,22.231 cw(c50.41,22.24) 48.67,22.618 48.629,25.969 cw(c50.41,25.99) 48.67,26.368 48.629,29.719 cw(c50.41,29.74) 48.67,30.118 48.629,35.777 cw(c50.41,35.79) 48.67,36.168 48.629,39.519 cw(c50.41,39.54) 48.67,39.918 48.629,43.269 cw(c50.41,43.29) 48.67,43.668 48.629,49.178 cw(c50.41,49.191) 48.67,49.569 48.629,52.92 cw(c50.41,52.941) 48.67,53.319 48.647,56.437 48.51,56.574 48.51,126.24 49.55,127.28 49.55,134.845 49.505,134.89 49.505,135.064 v3(49.458,135.111)
  B.Cu w0.254: U17.7@49.425,136.265 49.442,136.248 49.442,135.128 v3(49.458,135.111)
R16_A2: R119.2 U16.1 | length 112.9
  F.Cu w0.254: v3(33.65,134.89) 33.65,129.34 35.904,127.086 35.904,26.386 v1(36.8,25.49)
  B.Cu w0.254: v3(33.65,134.89) 33.65,136.24 U16.1@33.675,136.265 ; v1(36.8,25.49) 36.825,25.465 R119.2@36.825,24.69
R16_COM: J18.2 K18.11 | length 50.2
  F.Cu w2.5: 70.71,31.043 v1(70.975,31.308) v1(72.025,32.358) 72.5,32.833 v1(73.8,32.833) v1(75.55,32.833) v1(78.25,32.833) v1(80.45,32.833) 81.35,32.833 v1(82.55,31.633) 82.9,31.283
  F.Cu w3: K18.11@70.71,22.24 v1(70.71,24.183) v1(70.71,25.483) v1(70.71,26.683) v1(70.71,28.033) K18.11@70.71,29.74 70.71,31.043 ; J18.2@82.9,28.535 v1(82.9,30.233) 82.9,31.283
  B.Cu w2.5: 70.71,31.043 72.5,32.833 81.35,32.833 82.9,31.283
  B.Cu w3: K18.11@70.71,22.24 K18.11@70.71,29.74 70.71,31.043 ; J18.2@82.9,28.535 82.9,31.283
R16_NC: K18.12 | length 7.5
  B.Cu w0.6: K18.12@65.71,22.24 K18.12@65.71,29.74
R16_NO: J18.1 K18.14 | length 29.8
  F.Cu w2.5: K18.14@75.75,29.74 v1(75.75,28.233) v1(75.75,26.783) v1(75.75,25.683) v1(75.75,24.233) K18.14@75.75,22.24 76.965,23.455
  F.Cu w3: 76.965,23.455 v1(77.75,23.455) v1(79.4,23.455) v1(81.15,23.455) J18.1@82.9,23.455
  B.Cu w2.5: K18.14@75.75,22.24 75.75,23.483 K18.14@75.75,29.74
  B.Cu w3: 75.75,23.483 75.778,23.455 J18.1@82.9,23.455
Relay_ADC: J10.4 R86.2 | length 4.4
  B.Cu w0.3: J10.4@49.13,148.74 R86.2@53.52,148.74
Shift_O\E\: R90.2 U15.13 U16.13 U17.13 U18.13 | length 149.4
  F.Cu w0.254: v3(33.833,127.173) 34.954,126.052 34.954,14.536 v3(35.1,14.39) ; v3(52.85,127.79) 52.85,128.74 53.3,129.19 v3(53.35,129.19)
  B.Cu w0.254: v3(33.833,127.173) 33.874,127.132 35.542,127.132 36.477,128.067 36.477,128.967 ; v3(35.1,14.39) 35.45,14.39 37.45,12.39 38.363,11.477 38.363,10.227 R90.2@38.35,10.215 ; U16.13@35.625,130.54 35.625,129.819 36.477,128.967 ; U18.13@41.535,130.54 41.535,128.677 41.35,128.492 ; U17.13@47.475,130.54 47.475,128.817 47.15,128.492 ; v3(52.85,127.79) 52.45,127.39 50.55,127.39 49.448,128.492 47.15,128.492 ; U15.13@53.325,130.54 53.3,130.515 53.3,129.24 v3(53.35,129.19) ; 36.477,128.967 36.952,128.492 41.35,128.492 ; 41.35,128.492 47.15,128.492
ShiftReg_Latch: R89.2 U15.12 U16.12 U17.12 U18.12 | length 156.9
  F.Cu w0.254: v3(32.45,132.64) 32.45,127.74 34.5,125.69 v3(34.5,10.64) ; v3(42.2,131.54) 42.2,132.69 42.4,132.89 v3(42.633,132.89) ; v3(48.065,131.64) v3(48.065,132.89) ; v3(53.95,131.59) v3(53.95,132.89)
  B.Cu w0.254: v3(32.45,132.64) 32.7,132.89 36.05,132.89 ; v3(34.5,10.64) 35.9,10.64 36.325,10.215 R89.2@36.45,10.215 ; U16.12@36.275,130.54 36.275,132.665 36.05,132.89 ; 42.15,132.89 v3(42.633,132.89) ; U18.12@42.185,130.54 42.185,131.525 v3(42.2,131.54) ; v3(48.065,131.64) 48.125,131.58 U17.12@48.125,130.54 ; v3(53.95,131.59) 53.95,130.565 U15.12@53.975,130.54 ; v3(53.95,132.89) 36.05,132.89
ShiftRegCLK: R88.2 U15.11 U16.11 U17.11 U18.11 | length 147.6
  F.Cu w0.254: 49.008,13.332 49.124,14.402 49.083,22.233 cw(c50.41,22.24) 49.124,22.565 49.083,25.971 cw(c50.41,25.99) 49.124,26.315 49.083,29.721 cw(c50.41,29.74) 49.124,30.065 49.083,35.78 cw(c50.41,35.79) 49.124,36.115 49.083,39.521 cw(c50.41,39.54) 49.124,39.865 49.083,43.271 cw(c50.41,43.29) 49.124,43.615 49.083,49.178 cw(c50.41,49.191) 49.124,49.517 49.083,52.923 cw(c50.41,52.941) 49.124,53.267 49.084,56.642 48.964,56.868 48.964,125.64 50.15,126.826 50.15,130.299 50.148,130.301 50.148,130.779 50.15,130.781 50.15,132.267 v3(50.173,132.29)
  B.Cu w0.254: U16.11@36.925,130.54 36.925,131.94 36.927,131.94 37.3,132.313 43.05,132.313 ; U18.11@42.835,130.54 42.835,132.098 43.05,132.313 ; U17.11@48.775,130.54 48.775,132.088 49,132.313 ; 50.55,12.99 52.25,11.29 R88.2@52.25,10.215 ; U15.11@54.625,130.54 54.625,132.065 54.377,132.313 50.196,132.313 v3(50.173,132.29) 50.15,132.313 49,132.313 ; 43.05,132.313 49,132.313
ShiftRegDATA: R87.2 U15.14 | length 123.2
  F.Cu w0.254: 54.45,11.74 54.45,88.19 55.4,89.14 55.4,127.49 v3(55.65,127.74)
  B.Cu w0.254: U15.14@52.675,130.54 52.675,128.815 53.05,128.44 54.95,128.44 v3(55.65,127.74) ; R87.2@54.45,10.215 54.45,11.74
  other v3: 54.45,13.74
pads on no net: H5.Un1 H6.Un1 H7.Un1 H8.Un1 U18.9
copper on no net: | length 16
  B.Cu w0.254: 38.575,28.14 38.575,28.465 39.05,28.94 44.288,28.94
  B.Cu w0.3: 44.288,28.94 48.343,28.94 48.38,28.902
  B.Cu w0.6: 40.16,25.75 42.4,27.99 42.413,27.99 ; 48.488,24.49 49.16,24.49 50.41,25.74
  other v4: 63.735,141.965 62.035,142.065 61.635,145.765 63.835,145.765

## Polygon pours and split planes (outlines as drawn)
GND on F.Cu "F.Cu--1" (solid, remove dead copper, shelved, pour order 8): 59.31,145.875 59.71,146.275 64.31,146.275 64.71,145.875 64.71,141.975 64.31,141.575 59.745,141.575 59.347,142.009
GND on F.Cu "F.Cu--2" (solid, remove dead copper, shelved, pour order 9): 30.06,156.515 30.46,156.915 59.75,156.915 60.15,156.515 60.15,5.79 59.75,5.39 30.461,5.39 30.061,5.791
GND on F.Cu "F.Cu-" (solid, remove dead copper, shelved, pour order 6): 31.345,151.192 31.441,151.452 31.829,151.905 32.123,152.04 41.961,152.04 42.265,151.9 42.656,151.444 42.745,151.203 42.745,143.14 42.345,142.74 40.07,142.74 39.67,143.14 39.67,145.34 39.27,145.74 31.752,145.74 31.352,146.147
GND on B.Cu "B.Cu--2" (solid, remove dead copper, shelved, pour order 10): 30.459,156.511 30.864,156.91 59.754,156.52 60.149,156.119 59.751,5.794 59.346,5.395 30.458,5.786 30.063,6.188
GND on B.Cu "B.Cu--1" (solid, remove dead copper, shelved, pour order 7): 59.676,145.878 60.107,146.243 64.306,145.907 64.672,145.472 64.347,141.971 63.914,141.61 59.783,141.971 59.424,142.44
GND on B.Cu "B.Cu-" (solid, remove dead copper, shelved, pour order 5): 31.438,151.273 31.577,151.569 32.019,151.951 32.26,152.038 42.058,151.903 42.382,151.73 42.684,151.292 42.74,151.096 42.366,143.182 41.907,142.805 39.961,143.096 39.625,143.431 39.32,145.418 38.945,145.757 31.747,146.126 31.368,146.542

## Keep-outs
Keep-Out Layer:
  the board outline again, w0.254

## Silkscreen, mask and mechanical layers (free items; w line width, h text height)
F.SilkS:
  text "KNX_Relay_16CH_v0.2" at 3.85,5.608 h1
Edge.Cuts:
  lines w0.254: 3.05,5.36 87.55,5.36 87.55,151.64 3.05,151.64 3.05,5.36 ; 26.5,14.64 29.85,14.64 29.85,126.94 26.5,126.94 26.5,14.64 ; 60.65,14.64 64.05,14.64 64.05,126.94 60.65,126.94 60.65,14.64